# Altium PCB MicrocontrollerBrd.PcbDoc
Units mil, origin at the board's own origin, x right, y up, seen from the top; angles counter-clockwise.
Board outline 6000 x 4000 mil, 2 copper layers (Top Layer, Bottom Layer); 1 components, 0 nets, 100 pads, 0 vias.
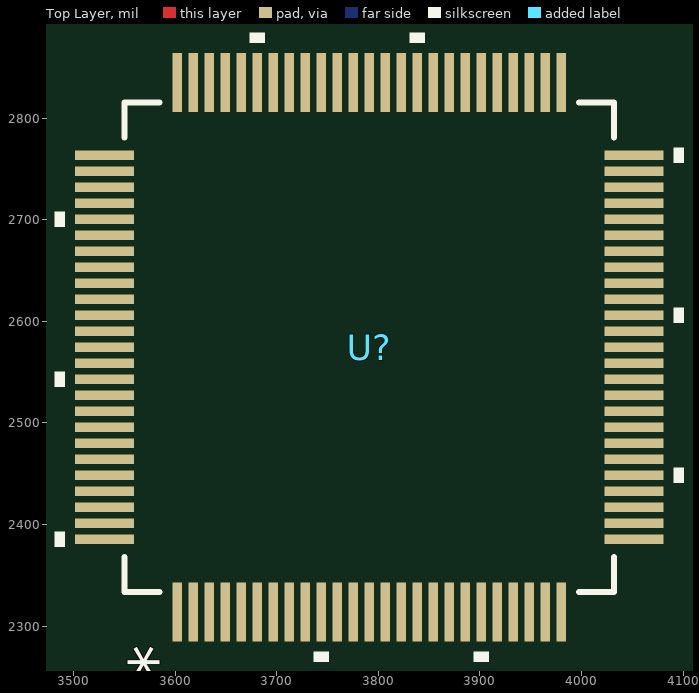
[diagram p0: Top Layer view]
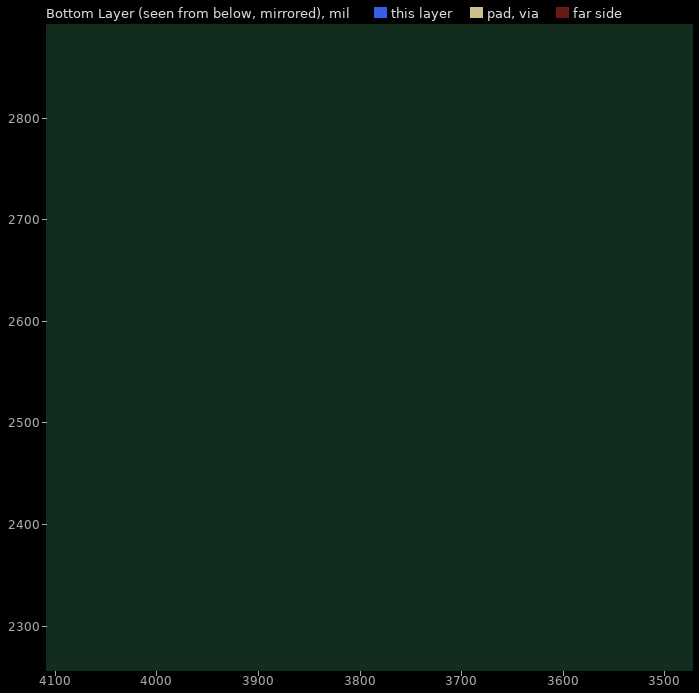
[diagram p1: Bottom Layer view, seen from below]

## Layer stack, top to bottom
Top Solder: solder mask 0.4, Solder Resist, Dk 3.5
Top Layer: signal copper 1.4
Dielectric 1: dielectric 12.6, FR-4, Dk 4.8
Bottom Layer: signal copper 1.4
Bottom Solder: solder mask 0.4, Solder Resist, Dk 3.5

## Board outline
1000,1000 7000,1000 7000,5000 1000,5000

## Design rules (kind name [scope] priority, off if disabled: settings)
Clearance [All] p1: gap=10 ignorepadtopadclearanceinfootprint=FALSE except(0: Arc-Hole Track-Hole SMDPad-Hole THPad-Hole Via-Hole Fill-Hole Poly-Hole Region-Hole Text-Hole)
PolygonConnect [All] p1: connectstyle=Relief reliefconductorwidth=10 reliefentries=4 polygonreliefangle="90 Angle" airgapwidth=10
RoomDefinition MCU_Breakout [InComponentClass('MCU_Breakout')] p1: confinementstyle=ConfineIn formatcopy=TRUE lockcomponents=FALSE outline 3286.02,1969.5 4646.02,1969.5 4646.02,3844.5 3286.02,3844.5
RoutingVias [All] p1: holewidth=28 width=50 viastyle="Through Hole" minholewidth=28 minwidth=50 maxholewidth=28 maxwidth=50
SolderMaskExpansion [All] p1: expansion=4 istentingtop=FALSE
Width [All] p1: maxlimit=10 minlimit=10 preferedwidth=10
30 further rules are at their usual default settings.

## Components (designator, comment, footprint, x,y, rotation, side; value= is the part's Value field where it differs from the comment)
U? "PIC32MX675F256L-80I/PT" TQFP100_12x12MC_MCH 3791.02,2574.5 r90 top

## Footprints (in the part's own frame and the unit in brackets; to place one, negate y for a bottom-side part, rotate by r counter-clockwise, add the part's x,y. Pads: shape width x height; smd on the part's side, far side on the other; paste and mask are expansions set on the pad)
TQFP100_12x12MC_MCH [mil]
  rect 58x9 smd paste+0 mask+0: 1(-260.5,188.98) 2(-260.5,173.23) 3(-260.5,157.48) 4(-260.5,141.73) 5(-260.5,125.98) 6(-260.5,110.24) 7(-260.5,94.49) 8(-260.5,78.74) 9(-260.5,62.99) 10(-260.5,47.24) 11(-260.5,31.5) 12(-260.5,15.75) 13(-260.5,0) 14(-260.5,-15.75) 15(-260.5,-31.5) 16(-260.5,-47.24) 17(-260.5,-62.99) 18(-260.5,-78.74) 19(-260.5,-94.49) 20(-260.5,-110.24) 21(-260.5,-125.98) 22(-260.5,-141.73) 23(-260.5,-157.48) 24(-260.5,-173.23) 25(-260.5,-188.98) 51(260.5,-188.98) 52(260.5,-173.23) 53(260.5,-157.48) 54(260.5,-141.73) 55(260.5,-125.98) 56(260.5,-110.24) 57(260.5,-94.49) 58(260.5,-78.74) 59(260.5,-62.99) 60(260.5,-47.24) 61(260.5,-31.5) 62(260.5,-15.75) 63(260.5,0) 64(260.5,15.75) 65(260.5,31.5) 66(260.5,47.24) 67(260.5,62.99) 68(260.5,78.74) 69(260.5,94.49) 70(260.5,110.24) 71(260.5,125.98) 72(260.5,141.73) 73(260.5,157.48) 74(260.5,173.23) 75(260.5,188.98)
  rect 9x58 smd paste+0 mask+0: 26(-188.98,-260.5) 27(-173.23,-260.5) 28(-157.48,-260.5) 29(-141.73,-260.5) 30(-125.98,-260.5) 31(-110.24,-260.5) 32(-94.49,-260.5) 33(-78.74,-260.5) 34(-62.99,-260.5) 35(-47.24,-260.5) 36(-31.5,-260.5) 37(-15.75,-260.5) 38(0,-260.5) 39(15.75,-260.5) 40(31.5,-260.5) 41(47.24,-260.5) 42(62.99,-260.5) 43(78.74,-260.5) 44(94.49,-260.5) 45(110.24,-260.5) 46(125.98,-260.5) 47(141.73,-260.5) 48(157.48,-260.5) 49(173.23,-260.5) 50(188.98,-260.5) 76(188.98,260.5) 77(173.23,260.5) 78(157.48,260.5) 79(141.73,260.5) 80(125.98,260.5) 81(110.24,260.5) 82(94.49,260.5) 83(78.74,260.5) 84(62.99,260.5) 85(47.24,260.5) 86(31.5,260.5) 87(15.75,260.5) 88(0,260.5) 89(-15.75,260.5) 90(-31.5,260.5) 91(-47.24,260.5) 92(-62.99,260.5) 93(-78.74,260.5) 94(-94.49,260.5) 95(-110.24,260.5) 96(-125.98,260.5) 97(-141.73,260.5) 98(-157.48,260.5) 99(-173.23,260.5) 100(-188.98,260.5)
  silkscreen extent -310,-310 310,310, body extent 0,0 10,10, height 10

## Part data
U?: "MIPS32® M4K™ series Microcontroller IC 32-Bit 80MHz 256KB (256K x 8) FLASH 100-TQFP (12x12)", Built_By=EMA_UL_Team, ComponentLink1Description="DigiKey Link", ComponentLink1URL=https://www.digikey.ca/en/products/detail/microchip-technology/PIC32MX675F256L-80I-PT/2184466, Copyright="Copyright (C) 2021 Accelerated Designs. All rights reserved", Manufacturer_Part_Number=PIC32MX675F256L-80I/PT, RefDes=RefDes, SourceLibrary=Microchip_2011-05-13, Type=DEV, Vendor=Microchip

## Nets (pads, with @x,y where several pads share a name; then routed paths per layer and width w, separated by ;. In a path a pad name is that pad's centre, name@x,y a point inside that pad or via, vN(x,y) a via of type N, cw(c..) or ccw(c..) an arc to the next point about the centre after c; other vN are vias at no path point)
pads on no net: U?.1 U?.2 U?.3 U?.4 U?.5 U?.6 U?.7 U?.8 U?.9 U?.10 U?.11 U?.12 U?.13 U?.14 U?.15 U?.16 U?.17 U?.18 U?.19 U?.20 U?.21 U?.22 U?.23 U?.24 U?.25 U?.26 U?.27 U?.28 U?.29 U?.30 U?.31 U?.32 U?.33 U?.34 U?.35 U?.36 U?.37 U?.38 U?.39 U?.40 U?.41 U?.42 U?.43 U?.44 U?.45 U?.46 U?.47 U?.48 U?.49 U?.50 U?.51 U?.52 U?.53 U?.54 U?.55 U?.56 U?.57 U?.58 U?.59 U?.60 U?.61 U?.62 U?.63 U?.64 U?.65 U?.66 U?.67 U?.68 U?.69 U?.70 U?.71 U?.72 U?.73 U?.74 U?.75 U?.76 U?.77 U?.78 U?.79 U?.80 U?.81 U?.82 U?.83 U?.84 U?.85 U?.86 U?.87 U?.88 U?.89 U?.90 U?.91 U?.92 U?.93 U?.94 U?.95 U?.96 U?.97 U?.98 U?.99 U?.100

## Text inside footprints (layer, text, board x,y; h text height)
U?: Top Overlay "*" at 3604.17,2247.5 h50 r90; Mechanical 7 "Default Horiz Padstyle: RX9Y58D0T" at 4316.52,2162 h50 r90; Mechanical 7 "Default Vert Padstyle: RX9Y58D0T" at 4376.52,2174.5 h50 r90; Mechanical 7 "Alt 1 Padstyle: OX60Y90D30P" at 4556.52,2237 h50 r90; Mechanical 7 "Alt 2 Padstyle: OX90Y60D30P" at 4616.52,2237 h50 r90; Mechanical 7 "0.016in/0.4mm" at 3622.42,2970 h25 r90; Mechanical 7 "0.03in/0.762mm" at 3395.52,2747.5 h25 r90; Mechanical 7 "0.551in/13.995mm" at 3320.52,2474.5 h25 r90; Mechanical 7 "0.472in/11.989mm" at 4211.52,2474.5 h25 r90; Mechanical 7 "0.472in/11.989mm" at 3803.52,1979 h25 r90; Mechanical 7 "0.551in/13.995mm" at 3803.52,3045 h25 r90; Mechanical 13 "*" at 3619.17,2341 h50 r90